# Altium PCB SunS_panels.PcbDoc
Units mm, origin at the board's own origin, x right, y up, seen from the top; angles counter-clockwise.
Board outline 6.75 x 21.51 mm, 4 copper layers (Component Side, VCC, GND, Solder Side), stack 0.844 mm thick; 6 components, 9 nets, 36 pads, 38 vias.
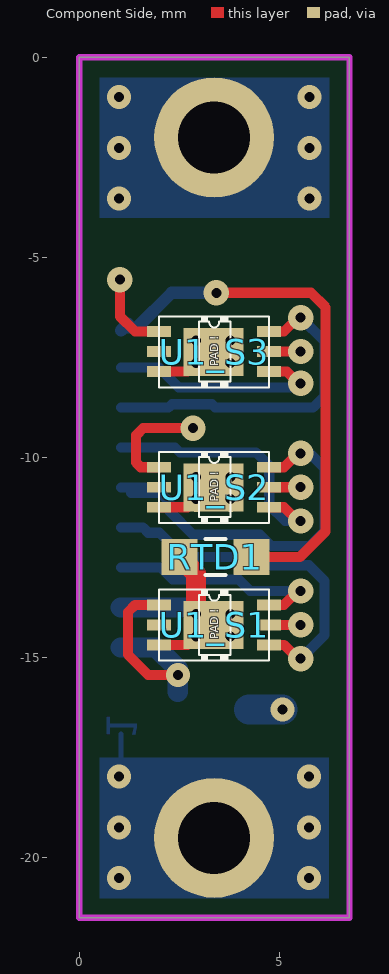
[diagram p0: Component Side view]
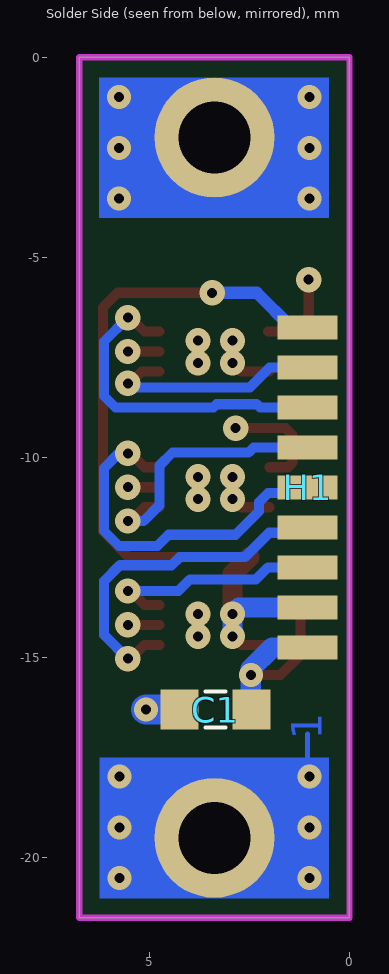
[diagram p1: Solder Side view, seen from below]
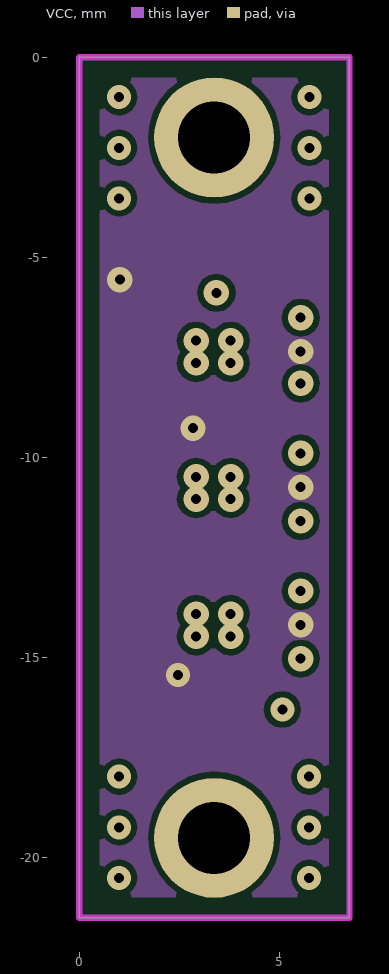
[diagram p2: VCC]
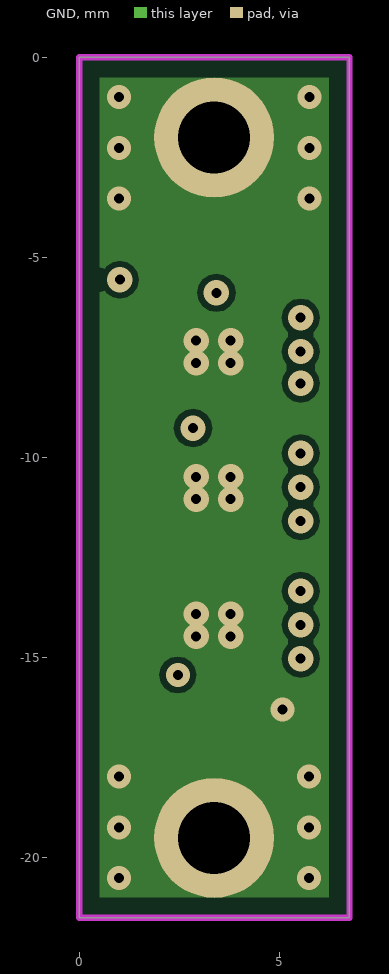
[diagram p3: GND]

## Layer stack, top to bottom
Component Side: signal copper 0.0356
Dielectric 1: core 0.32, FR-4, Dk 4.8
VCC: signal copper 0.036
Dielectric 6: prepreg 0.127, Dk 4.2
GND: signal copper 0.036
Dielectric 5: core 0.254, Dk 4.2
Solder Side: signal copper 0.0356

## Board outline
0,-21.514 0,0 6.753,0 6.753,-21.514

## Design rules (kind name [scope] priority, off if disabled: settings)
BoardOutlineClearance [All] p1: gap=0.5 ignorepadtopadclearanceinfootprint=FALSE
Clearance [All] p1: gap=0.152 ignorepadtopadclearanceinfootprint=FALSE except(0: Arc-Hole Track-Hole SMDPad-Hole THPad-Hole Via-Hole Fill-Hole Poly-Hole Region-Hole Text-Hole)
PlaneConnect [All] p1: planeconnectstyle=Direct reliefexpansion=0.508 reliefentries=4 reliefconductorwidth=0.254 reliefairgap=0.254
PolygonConnect [All] p1: connectstyle=Direct reliefconductorwidth=0.508 reliefentries=4 polygonreliefangle="90 Angle" airgapwidth=0.152
RoutingVias [All] p1: holewidth=0.305 width=0.711 viastyle="Through Hole" minholewidth=0.305 minwidth=0.711 maxholewidth=0.305 maxwidth=0.711
SolderMaskExpansion [All] p1: expansion=0.102
Width [All] p1: maxlimit=2.54 minlimit=0.203 preferedwidth=0.254 checkconnectedcopper=TRUE
29 further rules are at their usual default settings.

## Classes and differential pairs
channel class SunS_sensor: S1 S2 S3
component class SunS_top: C1 RTD1
component class S1: U1_S1
component class S2: U1_S2
component class S3: U1_S3
net class SDA[1..3]: SDA1 SDA2 SDA3
net class SCL[1..3]: SCL1 SCL2 SCL3

## Components (designator, comment, footprint, x,y, rotation, side; value= is the part's Value field where it differs from the comment)
C1 "100n/50V" SMD_Capacitor_0603 3.35,-16.307 r0 bottom
H1 "9_Wire_AWG-30_SMD" Wire_AWG-30_x9_SMD 1.041,-14.757 r90 bottom
RTD1 "1k" SMD_Resistor_0603 3.404,-12.497 r180 top
U1_S1 "BH1730FVC" WSOF6 2,-13.691 r0 top (schematic designator U1)
U1_S2 "BH1730FVC" WSOF6 2,-10.249 r0 top (schematic designator U1)
U1_S3 "BH1730FVC" WSOF6 2,-6.858 r0 top (schematic designator U1)

## Footprints (in the part's own frame and the unit in brackets; to place one, negate y for a bottom-side part, rotate by r counter-clockwise, add the part's x,y. Pads: shape width x height; smd on the part's side, far side on the other; paste and mask are expansions set on the pad)
SMD_Capacitor_0603 [mm] "SMD Capacitor, Inch 0603, Metric 1608."
  rect 0.95x1 smd: 1(-0.9,0) 2(0.9,0)
  silkscreen extent -0.25,-0.45 0.25,0.45, body extent -0.8,-0.4 0.8,0.4, height 0.3
SMD_Resistor_0603 [mm] "SMD Resistor, Inch 0603, Metric 1608."
  rect 0.9x0.9 smd: 1(-0.9,0) 2(0.9,0)
  silkscreen extent -0.25,-0.45 0.25,0.45, body extent -0.8,-0.45 0.8,0.45, height 0.5
Wire_AWG-30_x9_SMD [mm] "9 x SMD pads for an AWG-30 wire with stress relief, pitch 1.00 mm."
  rect 0.6x1.5 smd: 1(0,0) 2(1,0) 3(2,0) 4(3,0) 5(4,0) 6(5,0) 7(6,0) 8(7,0) 9(8,0)
WSOF6 [mm]
  rect 0.6x0.27 smd: 1(0,0) 2(0,-0.5) 3(0,-1) 4(2.75,-1) 5(2.75,-0.5) 6(2.75,0)
  rect 1.5x1.2 smd: DNC(1.353,-0.508)
  silkscreen extent 0,-1.4 2.75,0.38, body extent 0,-1.4 2.75,0.38, height 0.75

## Part data
C1: library part Cer_C0603T104K5RALTU, "Ceramic Cap Kemet COTS 100n/50V X7R 0603"
H1: library part Wire_AWG-30_9_SMD, "9 x SMD pads for an AWG-30 wire with stress relief, pitch 1.27mm."
RTD1: library part PTS060301B100RP100, "PT1000 Vishay PTS060301B100RP100"
U1_S1 U1_S2 U1_S3: "Digital 16bit Serial Output Type  Ambient Light Sensor IC"

## Free pads (board coordinates)
  round 3 hole 1.8: 0(3.375,-19.514) 0(3.375,-2.004)

## Via types
v1: diameter 0.635, hole 0.25, Component Side to Solder Side, 24 vias
v2: diameter 0.6, hole 0.25, Component Side to Solder Side, 14 vias

## Nets (pads, with @x,y where several pads share a name; then routed paths per layer and width w, separated by ;. In a path a pad name is that pad's centre, name@x,y a point inside that pad or via, vN(x,y) a via of type N, cw(c..) or ccw(c..) an arc to the next point about the centre after c; other vN are vias at no path point)
3V3: C1.1 H1.1 U1_S1.1 U1_S1.5 U1_S2.1 U1_S2.5 U1_S3.1 U1_S3.5 | length 12.9
  Component Side w0.254: v1(1.016,-5.563) 1.016,-6.477 1.397,-6.858 U1_S3.1 U1_S3.1@2.032,-6.858 ; U1_S1.1 1.397,-13.691 1.219,-13.868 1.219,-14.935 1.727,-15.443 v2(2.464,-15.443) ; U1_S2.1 1.537,-10.249 1.422,-10.135 1.422,-9.449 1.6,-9.271 v1(2.845,-9.271) ; U1_S1.5 v1(5.537,-14.191) ; U1_S2.5 v1(5.537,-10.749) ; U1_S3.5 v1(5.537,-7.358)
  Solder Side w0.508: H1.1 1.93,-14.757 2.464,-15.291 v2(2.464,-15.443) C1.1@2.464,-15.866
GND: C1.2 H1.2 pad.0 RTD1.2 U1_S1.3 U1_S1.DNC U1_S2.3 U1_S2.DNC U1_S3.3 U1_S3.DNC | length 8
  Component Side w0.254: U1_S1.3 2.708,-14.691 v1(2.921,-14.478) ; U1_S2.3 2.708,-11.249 U1_S2.DNC@2.921,-11.036 ; U1_S3.3 2.708,-7.858 v1(2.921,-7.645)
  Component Side w0.508: RTD1.2 2.921,-12.914 v1(2.921,-13.919)
  Solder Side w0.508: H1.2 2.759,-13.757 v1(2.921,-13.919) v1(2.921,-14.478)
  Solder Side w0.762: C1.2 v2(5.08,-16.307)
  other v1: 3.785,-14.478 3.785,-13.919 2.921,-11.049 3.785,-11.049 2.921,-10.49 3.785,-10.49 3.785,-7.645 2.921,-7.087 3.785,-7.087
  other v2: 0.997,-20.518 5.75,-20.518 0.997,-19.252 5.75,-19.252 0.997,-17.987 5.75,-17.987 1,-3.531 5.753,-3.531 1,-2.265 5.753,-2.265 1,-1 5.753,-1
PT1000: H1.9 RTD1.1 | length 13.4
  Component Side w0.254: v1(3.429,-5.889) 5.795,-5.889 6.159,-6.254 6.159,-11.853 5.516,-12.497 RTD1.1
  Solder Side w0.305: H1.9@1.041,-6.833 H1.9@1.219,-6.655 ; H1.9@1.219,-6.757 1.447,-6.757 2.315,-5.889 v1(3.429,-5.889)
SCL1: H1.3 U1_S1.6 | length 5.7
  Component Side w0.254: U1_S1.6 5.121,-13.691 5.467,-13.344 v1(5.537,-13.344)
  Solder Side w0.254: H1.3 2.038,-12.757 2.337,-13.056 3.988,-13.056 4.277,-13.344 v1(5.537,-13.344)
SCL2: H1.5 U1_S2.6 | length 9.5
  Component Side w0.254: U1_S2.6 5.121,-10.249 5.467,-9.903 v1(5.537,-9.903)
  Solder Side w0.254: H1.5 H1.5@1.638,-10.757 ; H1.5@1.295,-10.897 2.032,-10.897 2.261,-11.125 2.261,-11.354 2.845,-11.938 4.521,-11.938 4.801,-12.217 5.759,-12.217 6.134,-11.842 6.134,-10.274 5.762,-9.903 v1(5.537,-9.903)
SCL3: H1.7 U1_S3.6 | length 8.5
  Component Side w0.254: U1_S3.6 5.121,-6.858 5.467,-6.512 v1(5.537,-6.512)
  Solder Side w0.203: v1@5.503,-6.512 v1(5.537,-6.512)
  Solder Side w0.254: H1.7 2.235,-8.757 2.318,-8.674 3.315,-8.674 3.397,-8.757 5.848,-8.757 6.134,-8.471 6.134,-7.109 v1(5.537,-6.512)
SDA1: H1.4 U1_S1.4 | length 8.8
  Component Side w0.254: U1_S1.4 5.121,-14.691 5.467,-15.037 v1(5.537,-15.037)
  Solder Side w0.254: H1.4 1.597,-11.757 1.727,-11.887 2.007,-11.887 2.616,-12.497 4.242,-12.497 4.445,-12.7 5.737,-12.7 6.134,-13.097 6.134,-14.44 v1(5.537,-15.037)
SDA2: H1.6 U1_S2.4 | length 6.8
  Component Side w0.254: U1_S2.4 5.121,-11.249 5.467,-11.595 v1(5.537,-11.595)
  Solder Side w0.254: H1.6 2.391,-9.757 2.518,-9.884 4.423,-9.884 4.75,-10.211 4.75,-11.201 5.143,-11.595 v1(5.537,-11.595)
SDA3: H1.8 U1_S3.4 | length 5.7
  Component Side w0.254: U1_S3.4 5.191,-7.858 v1@5.537,-8.204
  Solder Side w0.254: H1.8 1.991,-7.757 2.489,-8.255 5.436,-8.255 v1(5.537,-8.153)
pads on no net: U1_S1.2 U1_S2.2 U1_S3.2
copper on no net: | length 0.9
  Solder Side w0.127: 1.041,-17.78 1.041,-16.916

## Polygon pours and split planes (outlines as drawn)
GND on GND "GND_L03_P000" (solid, remove dead copper, pour order 0): 0,0 6.753,0 6.753,-21.514 0,-21.514
3V3 on VCC "3V3_L02_P004" (solid, remove dead copper, pour order 4): 0,0 6.753,0 6.753,-21.514 0,-21.514

## Keep-outs
Keep-Out Layer:
  the board outline again, w0.152

## Other copper
Solder Side:
  region net GND: 0.51,-0.51 0.51,-4.008 6.248,-4.008 6.248,-0.51
  region net GND: 0.51,-17.51 0.51,-21.031 6.243,-21.031 6.243,-17.51
  text "1" at 0.686,-17.069 h0.76 r270

## Silkscreen, mask and mechanical layers (free items; w line width, h text height)
Mechanical 1:
  lines w0.152: 6.753,0 6.756,-0.003 ; 0,-21.514 6.753,-21.514 6.756,-21.511 6.756,0 0,0 0,-20.879 0,-21.514
Mechanical 13:
  region: 0,0 0,-4.008 6.753,-4.008 6.753,0
  region: 0,-21.518 0,-17.509 6.753,-17.509 6.753,-21.518

## Dimensions
6.756,0 to 6.756,-21.511 on Drill Guide
0,-21.514 to 3.375,-19.514 on Drill Guide
3.375,-19.514 to 0,-21.514 on Drill Guide
0,-21.514 to 6.753,-21.514 on Drill Guide
0,0 to 1.375,-2.004 on Drill Guide

## Text inside footprints (layer, text, board x,y; h text height)
U1_S1: Top Overlay "PAD !" at 3.473,-14.554 h0.2 r90
U1_S2: Top Overlay "PAD !" at 3.473,-11.112 h0.2 r90
U1_S3: Top Overlay "PAD !" at 3.473,-7.722 h0.2 r90